# Altium PCB MainPCB.PcbDoc
Units mil, origin at the board's own origin, x right, y up, seen from the top; angles counter-clockwise.
Board outline 2900 x 1500 mil, 2 copper layers (Top Layer, Bottom Layer); 6 components, 33 nets, 135 pads, 0 vias.
Unrouted connection lines stored in the file: 35.
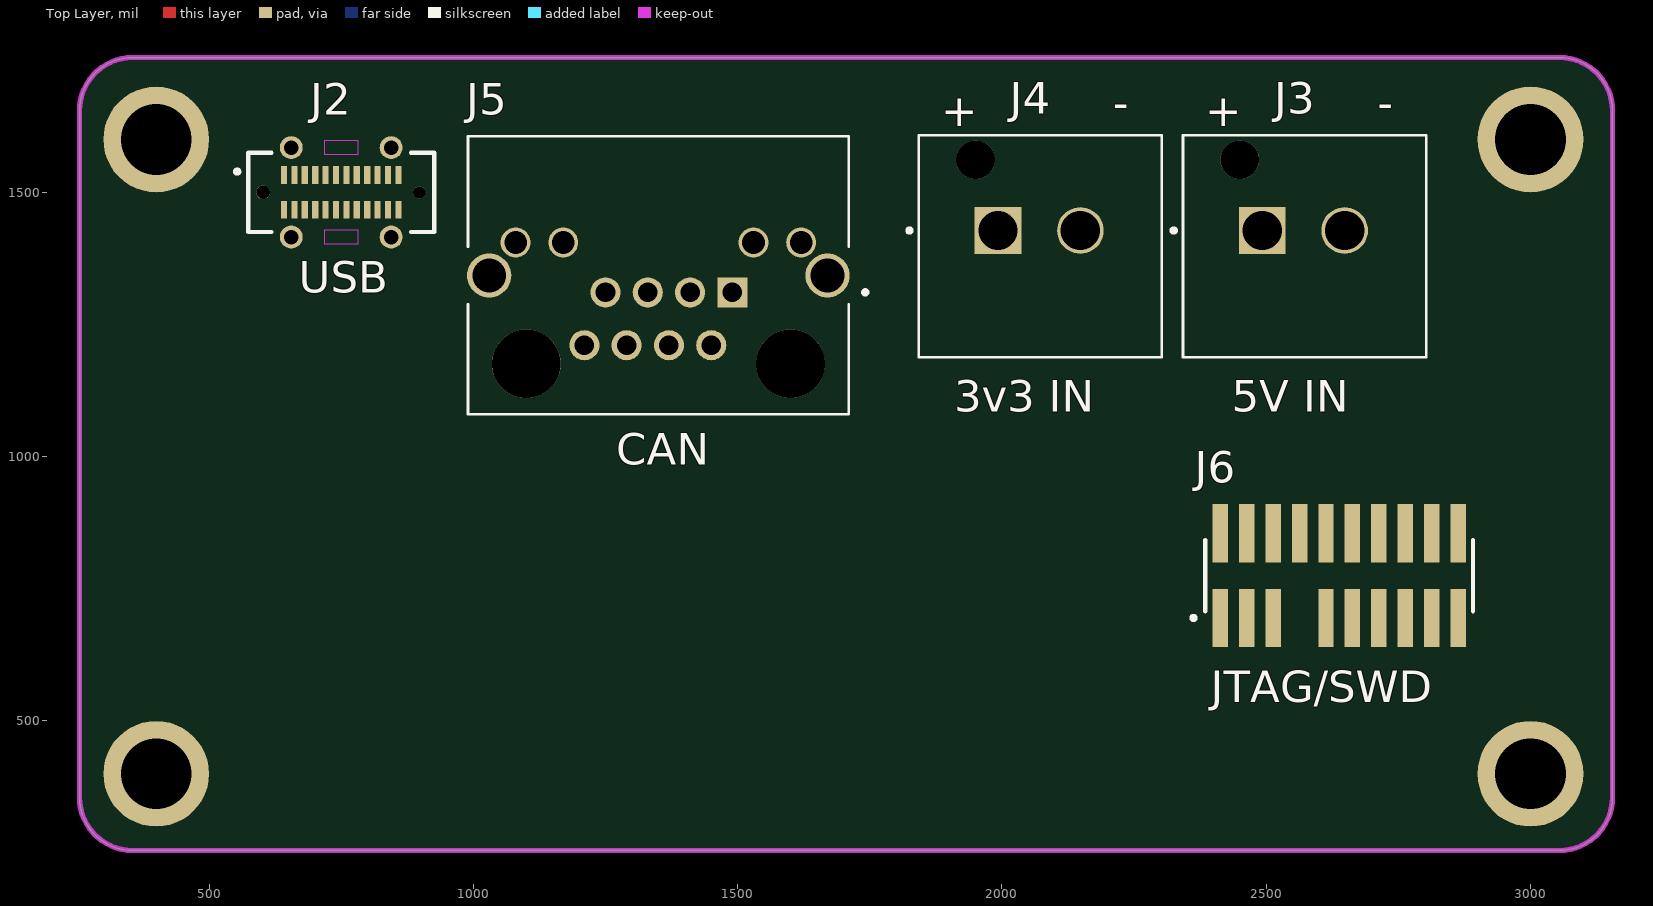
[diagram p0: Top Layer view]
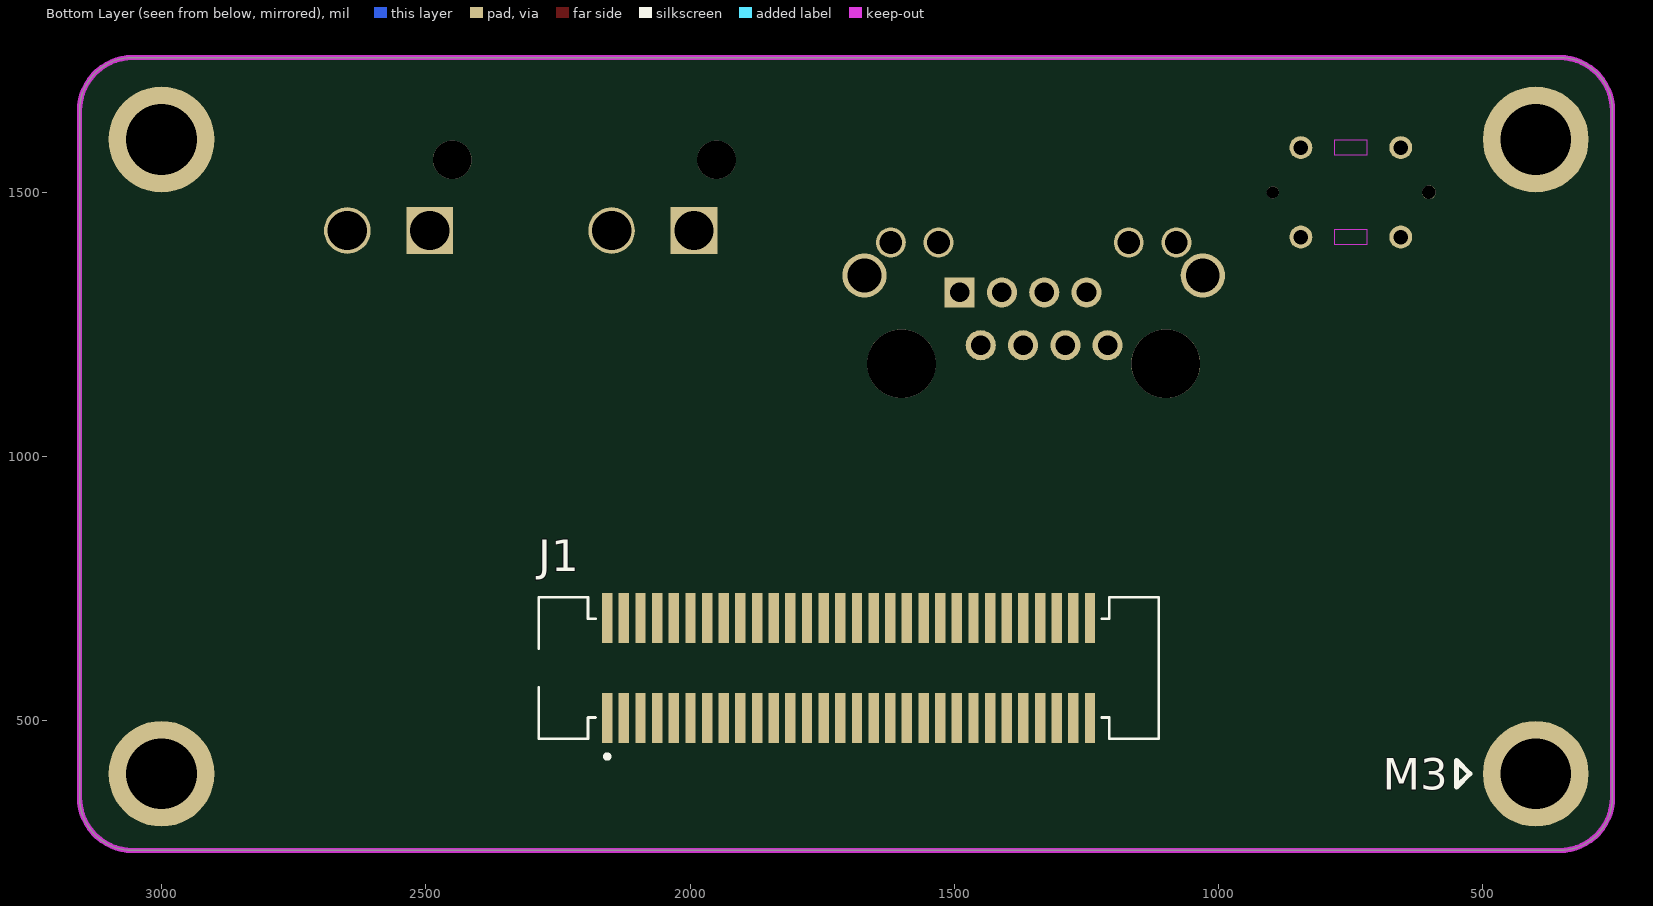
[diagram p1: Bottom Layer view, seen from below]

## Layer stack, top to bottom
Top Solder: solder mask 0.4, Solder Resist, Dk 3.5
Top Layer: signal copper 1.4
Dielectric 1: dielectric 12.6, FR-4, Dk 4.8
Bottom Layer: signal copper 1.4
Bottom Solder: solder mask 0.4, Solder Resist, Dk 3.5

## Board outline
255,355 255,1655 cw(c355,1655) 355,1755 3055,1755 cw(c3055,1655) 3155,1655 3155,355 cw(c3055,355) 3055,255 355,255 cw(c355,355)

## Design rules (kind name [scope] priority, off if disabled: settings)
Clearance [All] p1: gap=10 ignorepadtopadclearanceinfootprint=FALSE except(0: Arc-Hole Track-Hole SMDPad-Hole THPad-Hole Via-Hole Fill-Hole Poly-Hole Region-Hole Text-Hole)
DiffPairsRouting "Schematic Differential Pairs Routing" [InNetClass('CAN')] p1: maxlimit=10 minlimit=10 mostfreqgap=10 toplayer_minwidth=15 toplayer_maxwidth=15 toplayer_prefwidth=15 bottomlayer_minwidth=15 bottomlayer_maxwidth=15 bottomlayer_prefwidth=15 maxuncoupledlength=5
DiffPairsRouting [All] p2: maxlimit=10 minlimit=10 mostfreqgap=10 toplayer_minwidth=15 toplayer_maxwidth=15 toplayer_prefwidth=15 bottomlayer_minwidth=15 bottomlayer_maxwidth=15 bottomlayer_prefwidth=15 maxuncoupledlength=500
MatchedLengths "Schematic Matched Net Lengths" [InNetClass('CAN')] p1: tolerance=5 checknetsindiffpair=TRUE checkdiffpairvsdiffpair=FALSE checkxsignals=FALSE checkothers=FALSE
PolygonConnect [All] p1: connectstyle=Relief reliefconductorwidth=10 reliefentries=4 polygonreliefangle="90 Angle" airgapwidth=10
RoutingVias [All] p1: holewidth=28 width=50 viastyle="Through Hole" minholewidth=28 minwidth=50 maxholewidth=28 maxwidth=50
SolderMaskExpansion [All] p1: expansion=4 istentingtop=FALSE
Width [All] p1: maxlimit=10 minlimit=10 preferedwidth=10
29 further rules are at their usual default settings.

## Classes and differential pairs
differential pair class CAN_LINES: CAN
net class CAN: CAN_N CAN_P
differential pair CAN: +CAN_P -CAN_N

## Components (designator, comment, footprint, x,y, rotation, side; value= is the part's Value field where it differs from the comment)
J1 "10144517-061802LF" AMPHENOL_10144517-061802LF 1700,600 r0 bottom locked
J2 "USB4115-03-C" GCT_USB4115-03-C_REVB2 750,1500 r0 top
J3 "1877285-2" TE_1877285-2 2492.52,1427.8 r0 top
J4 "1877285-2" TE_1877285-2 1992.52,1427.8 r0 top
J5 "RJHSE-3381" AMPHENOL_RJHSE3381 1350,1175.77 r0 top
J6 "FTSH-110" SAMTEC_FTSH-110-01-L-DV-007 2638.09,775 r0 top

## Footprints (in the part's own frame and the unit in brackets; to place one, negate y for a bottom-side part, rotate by r counter-clockwise, add the part's x,y. Pads: shape width x height; smd on the part's side, far side on the other; paste and mask are expansions set on the pad)
AMPHENOL_10144517-061802LF [mm]
  rect 0.5x2.4 smd: 1(11.6,2.4) 2(11.6,-2.4) 3(10.8,2.4) 4(10.8,-2.4) 5(10,2.4) 6(10,-2.4) 7(9.2,2.4) 8(9.2,-2.4) 9(8.4,2.4) 10(8.4,-2.4) 11(7.6,2.4) 12(7.6,-2.4) 13(6.8,2.4) 14(6.8,-2.4) 15(6,2.4) 16(6,-2.4) 17(5.2,2.4) 18(5.2,-2.4) 19(4.4,2.4) 20(4.4,-2.4) 21(3.6,2.4) 22(3.6,-2.4) 23(2.8,2.4) 24(2.8,-2.4) 25(2,2.4) 26(2,-2.4) 27(1.2,2.4) 28(1.2,-2.4) 29(0.4,2.4) 30(0.4,-2.4) 31(-0.4,2.4) 32(-0.4,-2.4) 33(-1.2,2.4) 34(-1.2,-2.4) 35(-2,2.4) 36(-2,-2.4) 37(-2.8,2.4) 38(-2.8,-2.4) 39(-3.6,2.4) 40(-3.6,-2.4) 41(-4.4,2.4) 42(-4.4,-2.4) 43(-5.2,2.4) 44(-5.2,-2.4) 45(-6,2.4) 46(-6,-2.4) 47(-6.8,2.4) 48(-6.8,-2.4) 49(-7.6,2.4) 50(-7.6,-2.4) 51(-8.4,2.4) 52(-8.4,-2.4) 53(-9.2,2.4) 54(-9.2,-2.4) 55(-10,2.4) 56(-10,-2.4) 57(-10.8,2.4) 58(-10.8,-2.4) 59(-11.6,2.4) 60(-11.6,-2.4)
  silkscreen extent -14.9,-3.4 14.9,4.35, body extent -14.9,-3 14.9,3, height 3.65
AMPHENOL_RJHSE3381 [mm]
  rect 1.448x1.448 / inner round 1.448 / far side rect 1.448x1.448 hole 0.94: 1(3.556,3.43)
  round 1.448 hole 0.94: 2(2.54,0.89) 3(1.524,3.43) 4(0.508,0.89) 5(-0.508,3.43) 6(-1.524,0.89) 7(-2.54,3.43) 8(-3.556,0.89)
  round 1.44 hole 1.09: 9(6.86,5.827) 10(4.57,5.827) 11(-4.57,5.827) 12(-6.86,5.827)
  round 2.128 hole 1.62: S1(-8.13,4.24) S2(8.13,4.24)
  round 3.3 hole 3.3 unplated: ""(-6.35,0) ""(6.35,0)
  silkscreen extent -9.15,-2.43 10.04,10.93, body extent -9.14,-2.53 9.14,11.04, height 16.38
GCT_USB4115-03-C_REVB2 [mm]
  rect 0.3x0.85 smd: A1(-2.75,0.835) A2(-2.25,0.835) A3(-1.75,0.835) A4(-1.25,0.835) A5(-0.75,0.835) A6(-0.25,0.835) A7(0.25,0.835) A8(0.75,0.835) A9(1.25,0.835) A10(1.75,0.835) A11(2.25,0.835) A12(2.75,0.835) B1(2.75,-0.835) B2(2.25,-0.835) B3(1.75,-0.835) B4(1.25,-0.835) B5(0.75,-0.835) B6(0.25,-0.835) B7(-0.25,-0.835) B8(-0.75,-0.835) B9(-1.25,-0.835) B10(-1.75,-0.835) B11(-2.25,-0.835) B12(-2.75,-0.835)
  round 1.1 hole 0.7: S1(-2.4,2.15) S2(-2.4,-2.15) S3(2.4,-2.15) S4(2.4,2.15)
  round 0.66 hole 0.66 unplated: ""(-3.75,0)
  round 0.58 hole 0.58 unplated: ""(3.75,0)
  Keep-Out Layer region: 0.8,-2.5 -0.8,-2.5 -0.8,-1.8 0.8,-1.8
  Keep-Out Layer region: 0.8,1.8 -0.8,1.8 -0.8,2.5 0.8,2.5
  silkscreen extent -5.1,-1.9 4.47,1.9, body extent -4.47,-2.3 4.47,2.3, height 9.25
SAMTEC_FTSH-110-01-L-DV-007 [mm]
  rect 0.74x2.79 smd: 01(-5.715,-2.035) 02(-5.715,2.035) 03(-4.445,-2.035) 04(-4.445,2.035) 05(-3.175,-2.035) 06(-3.175,2.035) 08(-1.905,2.035) 09(-0.635,-2.035) 10(-0.635,2.035) 11(0.635,-2.035) 12(0.635,2.035) 13(1.905,-2.035) 14(1.905,2.035) 15(3.175,-2.035) 16(3.175,2.035) 17(4.445,-2.035) 18(4.445,2.035) 19(5.715,-2.035) 20(5.715,2.035)
  silkscreen extent -7.1,-2.13 6.44,1.72, body extent -6.35,-2.92 6.35,2.92, height 6.13
TE_1877285-2 [mm]
  rect 2.24x2.24 hole 1.89: 1(0,0)
  round 2.24 hole 1.89: 2(3.96,0)
  round 1.86 hole 1.86 unplated: ""(-1.08,3.4)
  silkscreen extent -4.35,-6.1 7.87,4.57, body extent -3.55,-5.82 7.62,4.06, height 12.01

## Part data
J1: "CONN RCPT 60POS SMD GOLD", Supplier Part Number 1=609-5433-1-ND, Supplier 1=Digi-Key
J2: "USB-C (USB TYPE-C) USB 3.2 Gen 2 (USB 3.1 Gen 2, Superspeed + (USB 3.1)) Receptacle Connector 24 Position Surface Mount, Through Hole", Supplier Part Number 1=4134645, Supplier 1="Future Electronics"
J3 J4: Supplier Part Number 1=A99845-ND, Supplier 1=Digi-Key
J5: "Jack Modular Connector 8p8c (RJ45, Ethernet) Vertical Shielded", Supplier Part Number 1=RJHSE-3381-ND, Supplier 1=Digi-Key
J6: library part FTSH-110-01-L-DV-007-K, "Connector Header Surface Mount 20 position 0.050\" (1.27mm)", Supplier Part Number 1=SAM9456-ND, Supplier 1=Digi-Key

## Free pads (board coordinates)
  round 200 hole 133.86 unplated: 30(400,400) 30(400,1600) 30(3000,400) 30(3000,1600)

## Nets (pads, with @x,y where several pads share a name; then routed paths per layer and width w, separated by ;. In a path a pad name is that pad's centre, name@x,y a point inside that pad or via, vN(x,y) a via of type N, cw(c..) or ccw(c..) an arc to the next point about the centre after c; other vN are vias at no path point)
3V3: J3.1
5V: J4.1
+3V3: J1.4 J1.6 J1.32 J1.34 J1.55 J1.57
+5V: J1.3 J1.5 J1.7 J1.31 J1.33 J1.54 J1.56 J1.58
CAN_N: J1.27
CAN_P: J1.25
GND: J1.1 J1.2 J1.8 J1.9 J1.18 J1.23 J1.24 J1.29 J1.30 J1.35 J1.36 J1.41 J1.42 J1.52 J1.53 J1.59 J1.60 J3.2 J4.2 J6.11 J6.13 J6.15 J6.17 J6.19
GNDDetect: 
JnRST: J6.10
JTAG_DBGACK: J1.16
JTAG_DBGRQ: J1.14
JTAG_nSRST: J1.12
JTAG_nTRST: J1.13
JTAG_RTCK: J1.21
JTAG_TCK: J1.19
JTAG_TDI: J1.15
JTAG_TDO: J1.10
JTAG_TMS: J1.17
JTAG_VREF: J1.11
JTCK/SWDCLK: 
JTDI: 
JTDO/SWO: 
JTMS/SWDIO: 
SWDCLK: J1.22
SWDIO: J1.20
TRACECLK: J6.12
TRD0: J6.14
TRD1: J6.16
TRD2: J6.18
TRD3: J6.20
USB_D+: J1.38
USB_D-: J1.40
VCC: 
pads on no net: J1.26 J1.28 J1.37 J1.39 J1.43 J1.44 J1.45 J1.46 J1.47 J1.48 J1.49 J1.50 J1.51 J2. J2.A1 J2.A2 J2.A3 J2.A4 J2.A5 J2.A6 J2.A7 J2.A8 J2.A9 J2.A10 J2.A11 J2.A12 J2.B1 J2.B2 J2.B3 J2.B4 J2.B5 J2.B6 J2.B7 J2.B8 J2.B9 J2.B10 J2.B11 J2.B12 J2.S1 J2.S2 J2.S3 J2.S4 J3. J4. J5. J5.1 J5.2 J5.3 J5.4 J5.5 J5.6 J5.7 J5.8 J5.9 J5.10 J5.11 J5.12 J5.S1 J5.S2 J6.01 J6.02 J6.03 J6.04 J6.05 J6.06 J6.08 J6.09

## Keep-outs
Keep-Out Layer:
  the board outline again, w10

## Silkscreen, mask and mechanical layers (free items; w line width, h text height)
Top Overlay:
  text "-" at 2240,1684.98 h60 r180
  text "-" at 2740,1684.98 h60 r180
  text "+" at 1885,1625 h60
  text "+" at 2385,1625 h60
  text "USB" at 670.03,1310 h60
  text "3v3 IN" at 1910,1085 h60
  text "5V IN" at 2435,1085 h60
  text "CAN" at 1270.03,985 h60
  text "JTAG/SWD" at 2395.07,535 h60
Bottom Overlay:
  lines w10: 525,400 550,375 550,425 525,400
  text "M3" at 690,370.01 h60
Mechanical 1:
  lines w10: 250,1000 3150,1000 ; 1700,250 1700,1750